# Altium PCB CandoM.PcbDoc
Units mm, origin at the board's own origin, x right, y up, seen from the top; angles counter-clockwise.
Board outline 47.5 x 16 mm, 2 copper layers (Top Layer, Bottom Layer); 33 components, 22 nets, 141 pads, 64 vias.
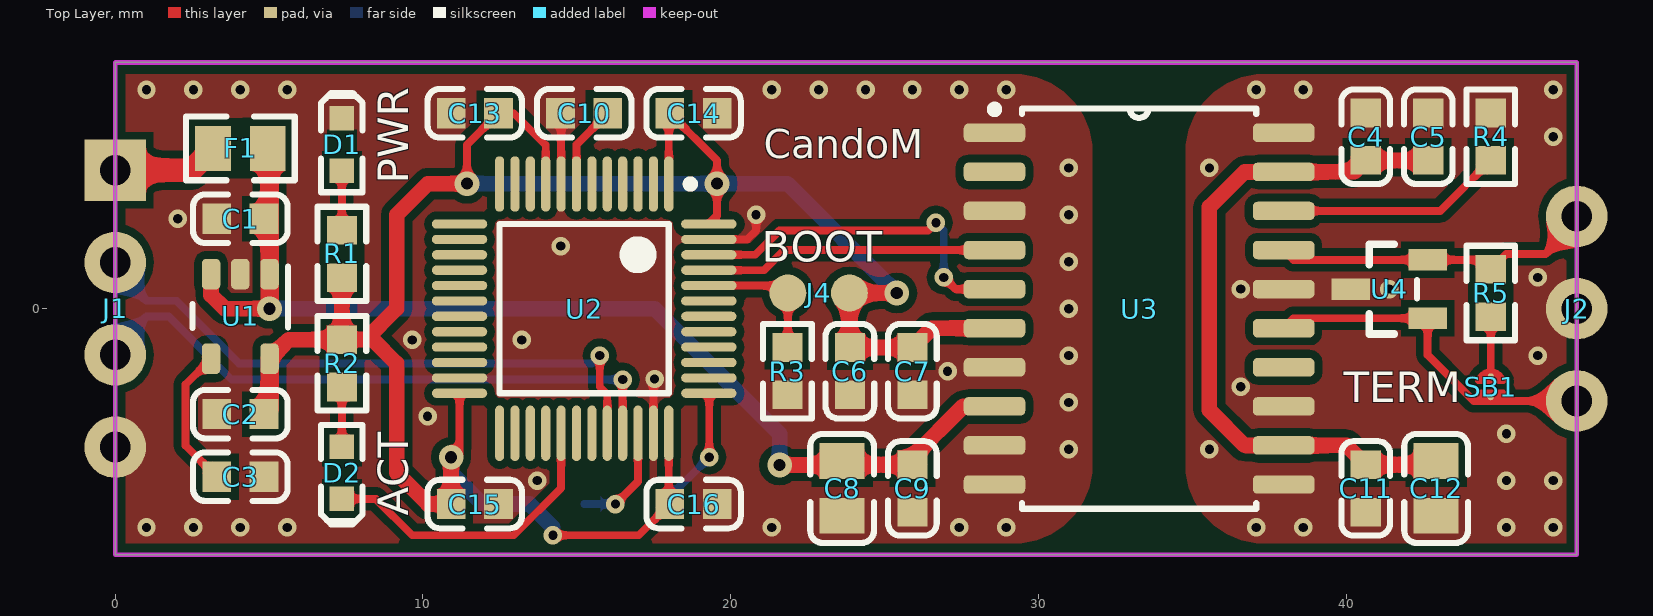
[diagram p0: Top Layer view]
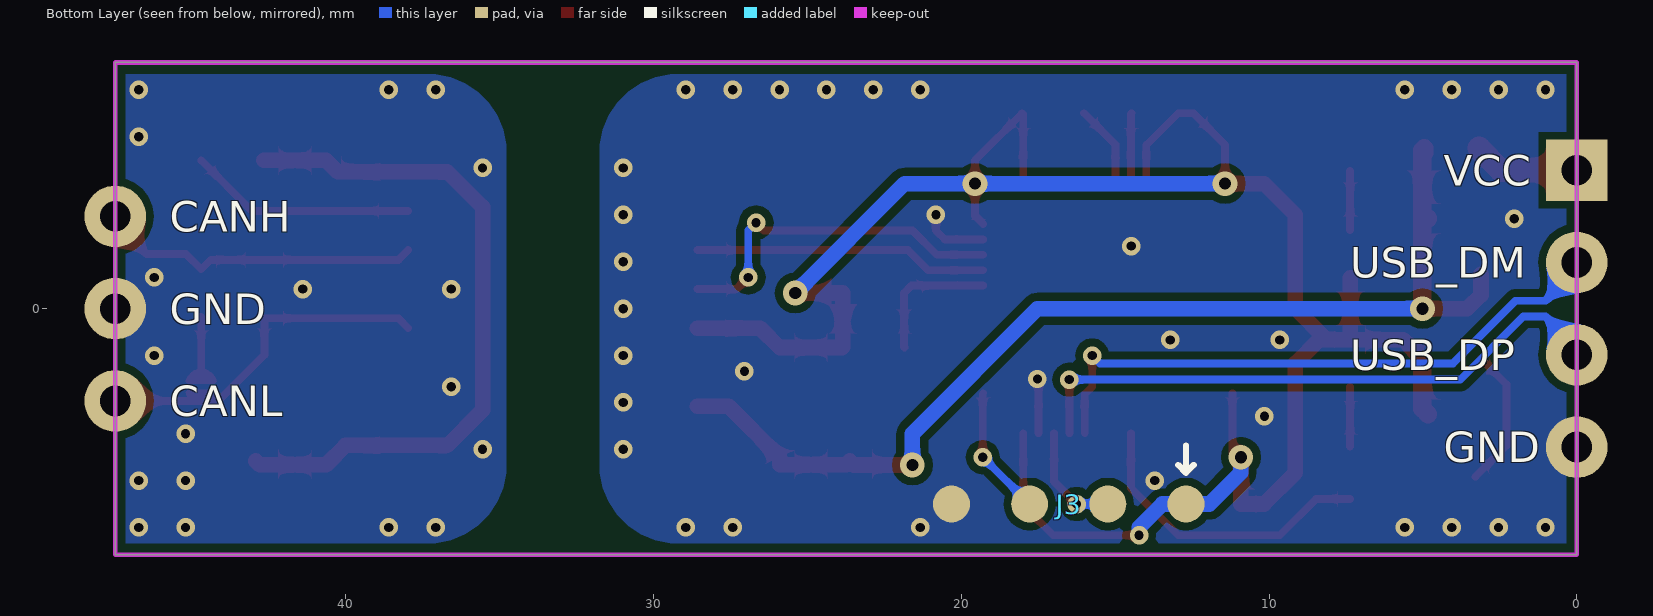
[diagram p1: Bottom Layer view, seen from below]
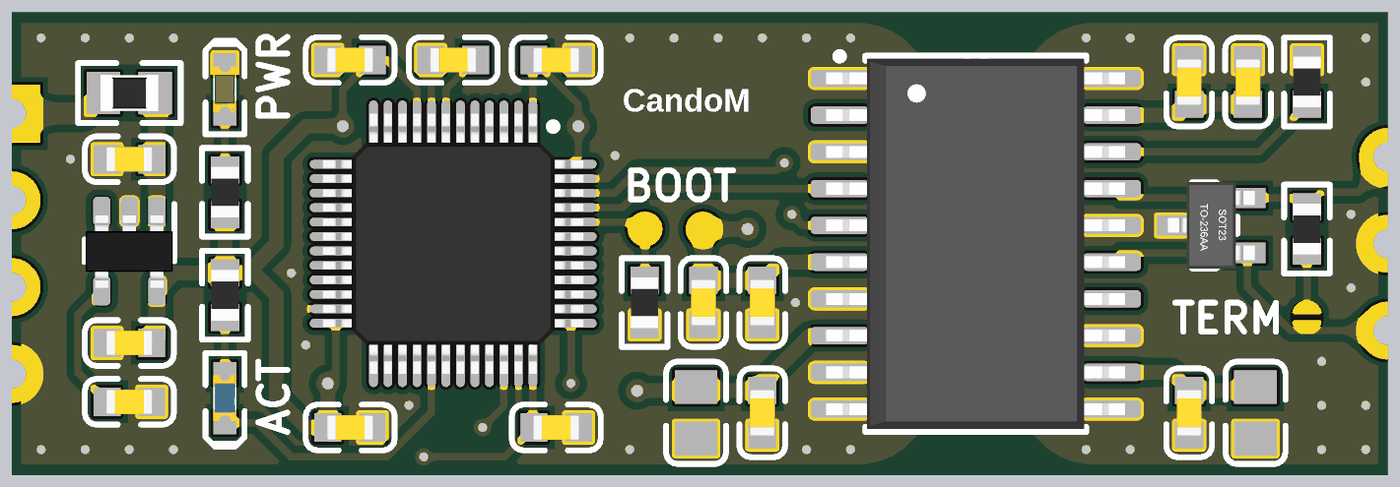
[diagram p2: 3D render of the assembled board from above, using the file's embedded part models]

## Layer stack, top to bottom
Top Solder: solder mask 0.0102, Solder Resist, Dk 3.5
Top Layer: signal copper 0.0356
Dielectric 1: dielectric 0.32, FR-4, Dk 4.8
Bottom Layer: signal copper 0.0356
Bottom Solder: solder mask 0.0102, Solder Resist, Dk 3.5

## Board outline
0,-8 47.498,-8 47.498,8 0,8

## Design rules (kind name [scope] priority, off if disabled: settings)
Clearance Clearance_5 [InNamedPolygon('PGND_L02_P008')] p1: gap=0.254 ignorepadtopadclearanceinfootprint=FALSE except(0: Arc-Hole Track-Hole SMDPad-Hole THPad-Hole Via-Hole Fill-Hole Poly-Hole Region-Hole Text-Hole)
Clearance Clearance_4 [InNamedPolygon('GND_L02_P006')] p2: gap=0.254 ignorepadtopadclearanceinfootprint=FALSE except(0: Arc-Hole Track-Hole SMDPad-Hole THPad-Hole Via-Hole Fill-Hole Poly-Hole Region-Hole Text-Hole)
Clearance Clearance_3 [InNamedPolygon('GND_L01_P002')] p3: gap=0.254 ignorepadtopadclearanceinfootprint=FALSE except(0: Arc-Hole Track-Hole SMDPad-Hole THPad-Hole Via-Hole Fill-Hole Poly-Hole Region-Hole Text-Hole)
Clearance Clearance_2 [InNamedPolygon('PGND_L01_P004')] p4: gap=0.254 ignorepadtopadclearanceinfootprint=FALSE except(0: Arc-Hole Track-Hole SMDPad-Hole THPad-Hole Via-Hole Fill-Hole Poly-Hole Region-Hole Text-Hole)
Clearance Clearance_1 [InNamedPolygon('PGND_L01_P004')] p5: gap=0.254 ignorepadtopadclearanceinfootprint=FALSE except(0: Arc-Hole Track-Hole SMDPad-Hole THPad-Hole Via-Hole Fill-Hole Poly-Hole Region-Hole Text-Hole)
Clearance [All] p6: gap=0.1 ignorepadtopadclearanceinfootprint=FALSE except(0: Arc-Hole Track-Hole SMDPad-Hole THPad-Hole Via-Hole Fill-Hole Poly-Hole Region-Hole Text-Hole)
Clearance Polygon [InPolygon] p7: gap=0.254 ignorepadtopadclearanceinfootprint=FALSE except(0: Arc-Hole Track-Hole SMDPad-Hole THPad-Hole Via-Hole Fill-Hole Poly-Hole Region-Hole Text-Hole)
PolygonConnect PolygonConnect_28 [All vs IsNamedPolygon('PGND_L02_P008')] p1: connectstyle=Direct reliefconductorwidth=0.254 reliefentries=4 polygonreliefangle="90 Angle" airgapwidth=0.254
PolygonConnect PolygonConnect_27 [All vs IsNamedPolygon('GND_L02_P006')] p2: connectstyle=Direct reliefconductorwidth=0.254 reliefentries=4 polygonreliefangle="90 Angle" airgapwidth=0.254
PolygonConnect PolygonConnect_26 [All vs IsNamedPolygon('GND_L01_P002')] p3: connectstyle=Direct reliefconductorwidth=0.254 reliefentries=4 polygonreliefangle="90 Angle" airgapwidth=0.254
PolygonConnect PolygonConnect_25 [All vs IsNamedPolygon('PGND_L01_P004')] p4: connectstyle=Direct reliefconductorwidth=0.254 reliefentries=4 polygonreliefangle="90 Angle" airgapwidth=0.254
PolygonConnect PolygonConnect_24 [All vs IsNamedPolygon('PGND_L01_P004')] p5: connectstyle=Direct reliefconductorwidth=0.254 reliefentries=4 polygonreliefangle="90 Angle" airgapwidth=0.254
PolygonConnect PolygonConnect_23 [All vs IsNamedPolygon('PGND_L01_P004')] p6: connectstyle=Direct reliefconductorwidth=0.254 reliefentries=4 polygonreliefangle="90 Angle" airgapwidth=0.254
PolygonConnect PolygonConnect_22 [All vs IsNamedPolygon('Top')] p7: connectstyle=Direct reliefconductorwidth=0.254 reliefentries=4 polygonreliefangle="90 Angle" airgapwidth=0.254
PolygonConnect PolygonConnect_21 [All vs IsNamedPolygon('Bottom')] p8: connectstyle=Direct reliefconductorwidth=0.254 reliefentries=4 polygonreliefangle="90 Angle" airgapwidth=0.254
PolygonConnect PolygonConnect_20 [All vs IsNamedPolygon('Top Layer-No Net')] p9: connectstyle=Direct reliefconductorwidth=0.254 reliefentries=4 polygonreliefangle="90 Angle" airgapwidth=0.254
PolygonConnect PolygonConnect_19 [All vs IsNamedPolygon('GND_L02_P006')] p10: connectstyle=Direct reliefconductorwidth=0.254 reliefentries=4 polygonreliefangle="90 Angle" airgapwidth=0.254
PolygonConnect PolygonConnect_18 [All vs IsNamedPolygon('GND_L02_P006')] p11: connectstyle=Direct reliefconductorwidth=0.254 reliefentries=4 polygonreliefangle="90 Angle" airgapwidth=0.254
PolygonConnect PolygonConnect_17 [All vs IsNamedPolygon('GND_L02_P006')] p12: connectstyle=Direct reliefconductorwidth=0.254 reliefentries=4 polygonreliefangle="90 Angle" airgapwidth=0.254
PolygonConnect PolygonConnect_16 [All vs IsNamedPolygon('GND_L02_P006')] p13: connectstyle=Direct reliefconductorwidth=0.254 reliefentries=4 polygonreliefangle="90 Angle" airgapwidth=0.254
PolygonConnect PolygonConnect_15 [All vs IsNamedPolygon('Bootom')] p14: connectstyle=Direct reliefconductorwidth=0.254 reliefentries=4 polygonreliefangle="90 Angle" airgapwidth=0.254
PolygonConnect PolygonConnect_14 [All vs IsNamedPolygon('Bootom')] p15: connectstyle=Relief reliefconductorwidth=0.254 reliefentries=4 polygonreliefangle="90 Angle" airgapwidth=0.254
PolygonConnect PolygonConnect_13 [All vs IsNamedPolygon('Bootom')] p16: connectstyle=Relief reliefconductorwidth=0.254 reliefentries=4 polygonreliefangle="90 Angle" airgapwidth=2.54
PolygonConnect PolygonConnect_12 [All vs IsNamedPolygon('Bootom')] p17: connectstyle=Direct reliefconductorwidth=0.254 reliefentries=4 polygonreliefangle="90 Angle" airgapwidth=0.254
PolygonConnect PolygonConnect_11 [All vs IsNamedPolygon('NONET_L02_P012')] p18: connectstyle=Direct reliefconductorwidth=0.254 reliefentries=4 polygonreliefangle="90 Angle" airgapwidth=0.254
PolygonConnect PolygonConnect_10 [All vs IsNamedPolygon('NONET_L02_P012')] p19: connectstyle=Direct reliefconductorwidth=0.254 reliefentries=4 polygonreliefangle="90 Angle" airgapwidth=0.254
PolygonConnect PolygonConnect_9 [All vs IsNamedPolygon('Top')] p20: connectstyle=Direct reliefconductorwidth=0.254 reliefentries=4 polygonreliefangle="90 Angle" airgapwidth=0.254
PolygonConnect PolygonConnect_8 [All vs IsNamedPolygon('GND_L02_P006')] p21: connectstyle=Direct reliefconductorwidth=0.254 reliefentries=4 polygonreliefangle="90 Angle" airgapwidth=0.254
PolygonConnect PolygonConnect_7 [All vs IsNamedPolygon('GND_L02_P006')] p22: connectstyle=Direct reliefconductorwidth=0.254 reliefentries=4 polygonreliefangle="90 Angle" airgapwidth=0.254
PolygonConnect PolygonConnect_6 [All vs IsNamedPolygon('GND_L02_P006')] p23: connectstyle=Direct reliefconductorwidth=0.254 reliefentries=4 polygonreliefangle="90 Angle" airgapwidth=0.254
PolygonConnect PolygonConnect_5 [All vs IsNamedPolygon('GND_L02_P004')] p24: connectstyle=Direct reliefconductorwidth=0.254 reliefentries=4 polygonreliefangle="90 Angle" airgapwidth=0.254
PolygonConnect PolygonConnect_4 [All vs IsNamedPolygon('GND_L02_P004')] p25: connectstyle=Direct reliefconductorwidth=0.254 reliefentries=4 polygonreliefangle="90 Angle" airgapwidth=0.254
PolygonConnect PolygonConnect_3 [All vs IsNamedPolygon('GND_L02_P004')] p26: connectstyle=Direct reliefconductorwidth=0.254 reliefentries=4 polygonreliefangle="90 Angle" airgapwidth=0.254
PolygonConnect PolygonConnect_2 [All vs IsNamedPolygon('GND_L02_P004')] p27: connectstyle=Direct reliefconductorwidth=0.254 reliefentries=4 polygonreliefangle="90 Angle" airgapwidth=0.254
PolygonConnect PolygonConnect_1 [All vs IsNamedPolygon('GND_L02_P004')] p28: connectstyle=Direct reliefconductorwidth=0.254 reliefentries=4 polygonreliefangle="90 Angle" airgapwidth=0.254
PolygonConnect [All] p29: connectstyle=Relief reliefconductorwidth=0.254 reliefentries=4 polygonreliefangle="90 Angle" airgapwidth=0.254
RoutingVias [All] p1: holewidth=0.711 width=1.27 viastyle="Through Hole" minholewidth=0.2 minwidth=0.1 maxholewidth=2 maxwidth=10
SolderMaskExpansion [All] p1: expansion=0.102 istentingtop=FALSE
Width [All] p1: maxlimit=6 minlimit=0.1 preferedwidth=0.254
30 further rules are at their usual default settings.

## Components (designator, comment, footprint, x,y, rotation, side; value= is the part's Value field where it differs from the comment)
C1 "4.7μF" CAP_0603 4.064,2.921 r0 top
C2 "4.7μF" CAP_0603 4.064,-3.429 r0 top
C3 "22nF" CAP_0603 4.064,-5.461 r180 top
C4 "10nF" CAP_0603 40.64,5.588 r90 top
C5 "100nF" CAP_0603 42.672,5.588 r90 top
C6 "100nF" CAP_0603 23.876,-2.032 r90 top
C7 "10nF" CAP_0603 25.908,-2.032 r90 top
C8 "10μF" CAP_0805 23.622,-5.842 r90 top
C9 "100nF" CAP_0603 25.908,-5.842 r90 top
C10 "100nF" CAP_0603 15.24,6.35 r0 top
C11 "100nF" CAP_0603 40.64,-5.842 r90 top
C12 "10μF" CAP_0805 42.926,-5.842 r90 top
C13 "100nF" CAP_0603 11.684,6.35 r0 top
C14 "100nF" CAP_0603 18.796,6.35 r180 top
C15 "100nF" CAP_0603 11.684,-6.35 r180 top
C16 "100nF" CAP_0603 18.796,-6.35 r180 top
D1 "green" LED_GREEN_0603 7.366,5.334 r90 top
D2 "blue" LED_BLUE_0603 7.366,-5.334 r270 top
F1 "PTC_0805" RES_0805 4.064,5.207 r0 top
J1 "USB" USB_PAD 0,0 r0 top
J2 "CAN_PAD" CAN_PAD 47.498,0 r0 top
J3 "SWD" SWD-2.54-4P 16.51,-6.35 r270 bottom
J4 "BOOT_2_2P" BOOT_2_2P 22.86,0.508 r270 top
R1 "10K" RES_0603 7.366,1.778 r270 top
R2 "10K" RES_0603 7.366,-1.778 r90 top
R3 "10K" RES_0603 21.844,-2.032 r270 top
R4 "10R" RES_0603 44.704,5.588 r90 top
R5 "120R" RES_0603 44.704,0.508 r270 top
SB1 "Solderbridge" SOLDERBRIDGE 44.704,-2.54 r270 top
U1 "RT9193-33GB" SOT23-5 4.064,-0.254 r270 top
U2 "STM32F072C8T6" STM-LQFP48_N 15.24,0 r270 top
U3 "ADM3053BRWZ" SOIC-20 33.274,0 r0 top
U4 "PSM712-LF-T7" SOT-23(SOT-23-3) 41.402,0.635 r0 top

## Footprints (in the part's own frame and the unit in brackets; to place one, negate y for a bottom-side part, rotate by r counter-clockwise, add the part's x,y. Pads: shape width x height; smd on the part's side, far side on the other; paste and mask are expansions set on the pad)
BOOT_2_2P [mm]
  round 1.2 smd paste-5: 1(0,1) 2(0,-1)
CAN_PAD [mm]
  round 2 hole 1: 1(0,3) 2(0,0) 3(0,-3)
CAP_0603 [mm]
  rect 0.93x0.98 smd: 1(-0.77,0) 2(0.77,0)
  silkscreen extent -1.53,-0.79 1.54,0.79, body extent -0.8,-0.43 0.8,0.43, height 0.8
CAP_0805 [mm]
  rect 1.16x1.47 smd: 1(-0.89,0) 2(0.89,0)
  silkscreen extent -1.77,-1.04 1.77,1.04, body extent -1,-0.62 1,0.63, height 0.94
LED_BLUE_0603 [mm]
  round 0.254 on Mech15: 0(0,0)
  rect 0.8x0.8 smd: A(-0.85,0) K(0.85,0)
  Top Layer pour cut-out: -0.5,0.5 0.5,0.5 0.5,-0.5 -0.5,-0.5
  silkscreen extent -1.55,-0.67 1.68,0.67, body extent -0.8,-0.4 0.8,0.4, height 0.6
LED_GREEN_0603 [mm]
  round 0.254 on Mech15: 0(0,0)
  rect 0.8x0.8 smd: A(-0.85,0) K(0.85,0)
  Top Layer pour cut-out: -0.5,0.5 0.5,0.5 0.5,-0.5 -0.5,-0.5
  silkscreen extent -1.55,-0.67 1.68,0.67, body extent -0.8,-0.4 0.8,0.4, height 0.6
RES_0603 [mm]
  rect 0.93x0.98 smd: 1(-0.77,0) 2(0.77,0)
  silkscreen extent -1.53,-0.79 1.54,0.79, body extent -0.87,-0.47 0.88,0.48, height 0.54
RES_0805 [mm]
  rect 1.16x1.47 smd: 1(-0.89,0) 2(0.89,0)
  silkscreen extent -1.77,-1.04 1.77,1.03, body extent -1,-0.62 1,0.63, height 0.5
SOIC-20 [mm]
  rrect50% 2x0.6 smd: 1(-4.699,5.715) 2(-4.699,4.445) 3(-4.699,3.175) 4(-4.699,1.905) 5(-4.699,0.635) 6(-4.699,-0.635) 7(-4.699,-1.905) 8(-4.699,-3.175) 9(-4.699,-4.445) 10(-4.699,-5.715) 11(4.699,-5.715) 12(4.699,-4.445) 13(4.699,-3.175) 14(4.699,-1.905) 15(4.699,-0.635) 16(4.699,0.635) 17(4.699,1.905) 18(4.699,3.175) 19(4.699,4.445) 20(4.699,5.715)
  silkscreen extent -4.82,-6.5 3.81,6.6, body extent -5.16,-6.4 5.16,6.4, height 2.6
SOLDERBRIDGE [mm]
  round 0.2 smd paste-10: 1(-0.338,0) 2(0.338,0)
  Top Layer region: 0.102,0.432 0.178,0.505 0.296,0.467 0.361,0.424 0.434,0.351 0.488,0.292 0.546,0.193 0.574,0.099 0.569,-0.122 0.544,-0.193 0.46,-0.33 0.376,-0.411 0.284,-0.469 0.183,-0.5 0.132,-0.483 0.102,-0.43
  Top Layer region: -0.102,-0.432 -0.178,-0.505 -0.296,-0.467 -0.361,-0.424 -0.434,-0.351 -0.488,-0.292 -0.546,-0.193 -0.574,-0.099 -0.569,0.122 -0.544,0.193 -0.46,0.33 -0.376,0.411 -0.284,0.469 -0.183,0.5 -0.132,0.483 -0.102,0.43
  Top Layer lines w0.152: 0.178,-0.431 ccw(c0.068,0) 0.346,-0.346 ccw(c0.068,0) 0.46,-0.209 ccw(c0.068,0) 0.46,0.209 ccw(c0.068,0) 0.338,0.353 ccw(c0.068,0) 0.178,0.431 ; -0.178,-0.431 cw(c-0.068,0) -0.512,0 cw(c-0.068,0) -0.178,0.431
SOT23-5 [mm]
  rrect50% 1x0.6 smd paste+0 mask+0.051: 1(-1.375,0.95) 2(-1.375,0) 3(-1.375,-0.95) 4(1.375,-0.95) 5(1.375,0.95)
  silkscreen extent -1.63,-1.55 0.38,1.55, body extent -1.23,-1.5 1.27,1.5, height 1.05
SOT-23(SOT-23-3) [mm]
  rect 1.25x0.7 smd: 1(1.25,-0.95) 2(1.25,0.95) 3(-1.25,0)
  silkscreen extent -0.65,-1.46 0.9,1.46, body extent -1.5,-1.5 1.5,1.5, height 1.3
STM-LQFP48_N [mm] "QFP, 48-Leads, Body 7x7mm, Pitch 0.5mm, IPC Medium Density"
  oval 1.8x0.3 smd: 1(-4.05,2.75) 2(-4.05,2.25) 3(-4.05,1.75) 4(-4.05,1.25) 5(-4.05,0.75) 6(-4.05,0.25) 7(-4.05,-0.25) 8(-4.05,-0.75) 9(-4.05,-1.25) 10(-4.05,-1.75) 11(-4.05,-2.25) 12(-4.05,-2.75) 25(4.05,-2.75) 26(4.05,-2.25) 27(4.05,-1.75) 28(4.05,-1.25) 29(4.05,-0.75) 30(4.05,-0.25) 31(4.05,0.25) 32(4.05,0.75) 33(4.05,1.25) 34(4.05,1.75) 35(4.05,2.25) 36(4.05,2.75)
  oval 0.3x1.8 smd: 13(-2.75,-4.05) 14(-2.25,-4.05) 15(-1.75,-4.05) 16(-1.25,-4.05) 17(-0.75,-4.05) 18(-0.25,-4.05) 19(0.25,-4.05) 20(0.75,-4.05) 21(1.25,-4.05) 22(1.75,-4.05) 23(2.25,-4.05) 24(2.75,-4.05) 37(2.75,4.05) 38(2.25,4.05) 39(1.75,4.05) 40(1.25,4.05) 41(0.75,4.05) 42(0.25,4.05) 43(-0.25,4.05) 44(-0.75,4.05) 45(-1.25,4.05) 46(-1.75,4.05) 47(-2.25,4.05) 48(-2.75,4.05)
  silkscreen extent -4.17,-2.75 2.75,3.58, body extent -4.5,-4.5 4.5,4.5, height 1.6
SWD-2.54-4P [mm]
  round 1.2 smd paste-5: 1(0,3.81) 2(0,1.27) 3(0,-1.27) 4(0,-3.81)
USB_PAD [mm]
  rect 2x2 hole 1: 1(0,4.5)
  round 2 hole 1: 2(0,1.5) 3(0,-1.5) 4(0,-4.5)

## Part data
C1 C2: library part CAP_4.7μF_0603, "Cap 4.7μF 6.3V X5R 0603"
C3: library part CAP_22nF_0603, "Cap 22nF 50V X5R 0603"
C4 C7: library part CAP_10nF_0603, "Cap 10nF 50V X5R 0603"
C5 C6 C9 C10 C11 C13 C14 C15 C16: library part CAP_100nF_0603, "Cap 100nF 50V X5R 0603"
C8 C12: library part CAP_10μF_0805, "Cap 10μF 25V X5R 0805"
D1: library part LED_GREEN_0603, "LED green 0603"
D2: library part LED_BLUE_0603, "LED blue 0603"
F1: "PTC 0.5A 0805 C20978"
J3: "SWD 2.54 4P"
R1 R2 R3: library part RES_10K_0603, "Res SMD 10K 5% 1/10W 0603"
R4: library part RES_10R_0603, "Res SMD 10R 1% 1/10W 0603"
R5: library part RES_120R_0603, "Res SMD 120R 1% 1/10W 0603"
U1: "Chip RT9193-33GB LDO Regulator C15651"
U2: "Chip STM32F072C8T6 C80488"
U3: "Chip ADM3053BRWZ"
U4: "TVS"

## Via types
v1: diameter 0.6, hole 0.3, Top Layer to Bottom Layer, tented both sides, 58 vias
v2: diameter 0.8, hole 0.4, Top Layer to Bottom Layer, tented both sides, 6 vias

## Nets (pads, with @x,y where several pads share a name; then routed paths per layer and width w, separated by ;. In a path a pad name is that pad's centre, name@x,y a point inside that pad or via, vN(x,y) a via of type N, cw(c..) or ccw(c..) an arc to the next point about the centre after c; other vN are vias at no path point)
5V: C1.2 C8.2 C9.2 F1.2 U1.1 U1.3 U3.8 | length 35.4
  Top Layer w0.508: U1.3 3.114,0.442 3.556,0 v2(5.014,0) ; v2(21.59,-5.08) 23.494,-5.08 C8.2 23.742,-5.072 C9.2 25.908,-4.826 27.559,-3.175 U3.8
  Top Layer w0.6: C1.2 C1.2@4.834,2.94 ; F1.2@4.954,5.068 F1.2 5.014,5.147 U1.1 v2(5.014,0)
  Bottom Layer w0.508: v2(5.014,0) 17.526,0 21.59,-4.064 v2(21.59,-5.08)
BOOT0: J4.2 R3.1 U2.44 | length 4.4
  Top Layer w0.254: U2.44 21.618,0.75 J4.2 21.86,-1.246 R3.1
CAN_RX: U2.45 U3.4 | length 9.6
  Top Layer w0.254: U2.45 21.082,1.25 21.737,1.905 U3.4
CAN_TX: U2.46 U3.5 | length 11.5
  Top Layer w0.254: U2.46 20.8,1.75 21.59,2.54 26.416,2.54 v1(26.67,2.794) ; v1(26.924,1.016) 27.305,0.635 U3.5
  Bottom Layer w0.254: v1(26.67,2.794) 26.924,2.54 v1(26.924,1.016)
CANH: J2.1 R5.1 U3.17 U4.2 | length 10.5
  Top Layer w0.254: U3.17 38.293,1.585 U4.2 44.397,1.585 R5.1 45.204,1.778 46.482,1.778 47.169,2.465 J2.1@47.169,3
CANL: J2.3 SB1.2 U3.15 U4.1 | length 11
  Top Layer w0.254: U3.15 38.293,-0.315 U4.1 42.652,-1.504 44.148,-3 44.495,-3 44.913,-3 J2.3@47.046,-3
GND: C1.1 C2.1 C3.1 C6.1 C7.1 C8.1 C9.1 C10.1 C13.1 C14.1 C15.1 C16.1 D1.K J1.4 J3.4 R3.2 U1.2 U2.8 U2.23 U2.35 U2.47 U3.1 U3.3 U3.7 U3.9 U3.10 | length 6.3
  Top Layer w0.254: C10.1 14.49,6.33 U2.8 ; U2.35 17.49,-2.322 v1(17.526,-2.286) ; U2.47 20.538,2.25 20.828,2.54 v1(20.828,3.048)
  other v1: 1.016,-7.112 2.54,-7.112 4.064,-7.112 5.588,-7.112 21.336,-7.112 27.432,-7.112 28.956,-7.112 13.716,-5.588 30.988,-4.572 10.152,-3.498 30.988,-3.048 27.051,-2.032 30.988,-1.524 9.652,-1.016 13.208,-1.016 30.988,0 30.988,1.524 14.478,2.032 2.032,2.921 30.988,3.048 30.988,4.572 1.016,7.112 2.54,7.112 4.064,7.112 5.588,7.112 21.336,7.112 22.86,7.112 24.384,7.112 25.908,7.112 27.432,7.112 28.956,7.112
LED_ACT: D2.K U2.29 | length 10
  Top Layer w0.254: D2.K 8.47,-6.184 9.652,-7.366 12.954,-7.366 14.49,-5.83 U2.29
NetC3_2: C3.2 U1.4 | length 4.6
  Top Layer w0.254: U1.4 2.286,-2.457 2.286,-4.453 C3.2
NetC4_1: C4.1 C5.1 C11.2 C12.2 U3.12 U3.19 | length 22.5
  Top Layer w0.508: C5.1 C4.1 40.267,4.445 U3.19 36.703,4.445 35.56,3.302 35.56,-3.302 36.703,-4.445 U3.12 40.013,-4.445 C11.2 42.806,-5.072 C12.2
NetC10_2: C10.2 U2.7 | length 2.7
  Top Layer w0.254: U2.7 14.99,5.33 C10.2
NetD1_A: D1.A R1.1 | length 1.9
  Top Layer w0.254: R1.1 D1.A
NetD2_A: D2.A R2.1 | length 1.9
  Top Layer w0.254: D2.A R2.1
NetF1_1: F1.1 J1.1 | length 3.5
  Top Layer w0.762: J1.1 2.467,4.5 F1.1
NetR4_1: R4.1 U3.18 | length 7.4
  Top Layer w0.254: U3.18 43.061,3.175 R4.1
NetR5_2: R5.2 SB1.1 | length 1.9
  Top Layer w0.254: SB1.1 44.704,-2.028 R5.2
PGND: C4.2 C5.2 C11.1 C12.1 J2.2 R4.2 U3.11 U3.13 U3.16 U3.20 U4.3
  other v1: 37.084,-7.112 38.608,-7.112 45.212,-7.112 46.736,-7.112 45.212,-5.588 46.736,-5.588 35.56,-4.572 45.212,-4.064 36.576,-2.54 46.228,-1.524 36.576,0.635 41.402,0.635 46.228,1.016 35.56,4.572 46.736,5.588 37.084,7.112 38.608,7.112 46.736,7.112
SWCLK: J3.3 U2.37 | length 4.2
  Top Layer w0.254: U2.37 19.304,-2.764 v1(19.304,-4.826)
  Bottom Layer w0.254: J3.3 v1(19.304,-4.826)
SWDIO: J3.2 U2.34 | length 3.6
  Top Layer w0.254: v1(16.256,-6.35) 16.99,-5.616 U2.34
  Bottom Layer w0.254: J3.2 v1(16.256,-6.35)
USB_DM: J1.2 U2.32 | length 19.8
  Top Layer w0.254: v1(15.748,-1.524) 15.748,-2.54 15.99,-2.782 U2.32
  Bottom Layer w0.254: J1.2@0.329,1.5 0.329,0.941 1.016,0.254 1.991,0.254 4.023,-1.778 15.494,-1.778 v1(15.748,-1.524)
USB_DP: J1.3 U2.33 | length 19.6
  Top Layer w0.254: U2.33 v1(16.49,-2.306)
  Bottom Layer w0.254: J1.3@0.329,-1.5 0.329,-0.941 1.016,-0.254 1.737,-0.254 3.789,-2.306 v1(16.49,-2.306)
V3.3: C2.2 C6.2 C7.2 C13.2 C14.2 C15.2 C16.2 J3.1 J4.1 R1.2 R2.2 U1.5 U2.1 U2.9 U2.24 U2.36 U2.48 U3.6 | length 72.9
  Top Layer w0.254: v2(10.914,-4.826) 11.19,-4.55 U2.24 ; v2(11.43,4.064) 11.43,5.326 C13.2 12.954,6.35 13.99,5.314 U2.9 ; v1(14.224,-7.366) 17.01,-7.366 C16.2 17.99,-6.314 U2.36 ; U2.1 17.99,6.314 C14.2 19.558,4.818 v2(19.558,4.064) 19.558,3.018 U2.48
  Top Layer w0.508: U1.5 5.635,-1.008 R2.2 ; R1.2 R2.2 ; v2(10.914,-4.826) C15.2 10.16,-6.35 9.144,-5.334 9.144,-1.778 8.374,-1.008 8.136,-1.008 ; v2(11.43,4.064) 10.16,4.064 9.144,3.048 9.144,0 8.136,-1.008 ; v2(25.4,0.508) J4.1 23.86,-1.246 C6.2 C7.2 26.535,-0.635 U3.6 ; R2.2 8.136,-1.008
  Top Layer w0.6: C2.2 5.014,-3.249 U1.5
  Bottom Layer w0.508: v2(10.914,-4.826) 10.914,-5.326 11.938,-6.35 J3.1 13.462,-6.35 14.224,-7.112 v1(14.224,-7.366) ; v2(11.43,4.064) v2(19.558,4.064) 21.844,4.064 v2(25.4,0.508)
pads on no net: D1.0 D2.0 U2.2 U2.3 U2.4 U2.5 U2.6 U2.10 U2.11 U2.12 U2.13 U2.14 U2.15 U2.16 U2.17 U2.18 U2.19 U2.20 U2.21 U2.22 U2.25 U2.26 U2.27 U2.28 U2.30 U2.31 U2.38 U2.39 U2.40 U2.41 U2.42 U2.43 U3.2 U3.14

## Polygon pours and split planes (outlines as drawn)
GND on Top Layer "GND_L01_P002" (solid, pour order 2): 0,7.62 29.21,7.62 cw(c29.21,5.08) 31.75,5.08 31.75,-5.08 cw(c29.21,-5.08) 29.21,-7.62 0,-7.62
PGND on Top Layer "PGND_L01_P004" (solid, pour order 4): 47.498,7.62 37.338,7.62 ccw(c37.338,5.08) 34.798,5.08 34.798,-5.08 ccw(c37.338,-5.08) 37.338,-7.62 47.498,-7.62
GND on Bottom Layer "GND_L02_P006" (solid, pour order 6): 0,7.62 29.21,7.62 cw(c29.21,5.08) 31.75,5.08 31.75,-5.08 cw(c29.21,-5.08) 29.21,-7.62 0,-7.62
PGND on Bottom Layer "PGND_L02_P008" (solid, pour order 8): 47.498,7.62 37.338,7.62 ccw(c37.338,5.08) 34.798,5.08 34.798,-5.08 ccw(c37.338,-5.08) 37.338,-7.62 47.498,-7.62

## Keep-outs
Keep-Out Layer:
  the board outline again, w0.15

## Other copper
Top Layer:
  pour cut-out: 14.49,-5.08 16.99,-5.08 16.99,-7.346 17.01,-7.366 13.462,-7.366

## Silkscreen, mask and mechanical layers (free items; w line width, h text height)
Top Overlay:
  text "CandoM" at 21.082,4.572 h1.6
  text "PWR" at 9.525,4.064 h1 r90
  text "BOOT" at 21.006,1.524 h1
  text "TERM" at 39.929,-3.048 h1
  text "ACT" at 9.525,-6.731 h1 r90
Bottom Overlay:
  lines w0.2: 12.446,-5.08 12.7,-5.334 ; 12.7,-4.445 12.7,-5.334 ; 12.954,-5.08 12.7,-5.334
  text "VCC" at 4.318,4 h1
  text "CANH" at 45.72,2.5 h1
  text "USB_DM" at 7.366,1 h1
  text "GND" at 45.72,-0.5 h1
  text "USB_DP" at 7.366,-2 h1
  text "CANL" at 45.72,-3.5 h1
  text "GND" at 4.318,-5 h1